# Altium PCB Hamilton.PcbDoc
Units mil, origin at the board's own origin, x right, y up, seen from the top; angles counter-clockwise.
Board outline 1850 x 940 mil, 2 copper layers (Top Layer, Bottom Layer), stack 60.8 mil thick; 14 components, 13 nets, 58 pads, 19 vias.
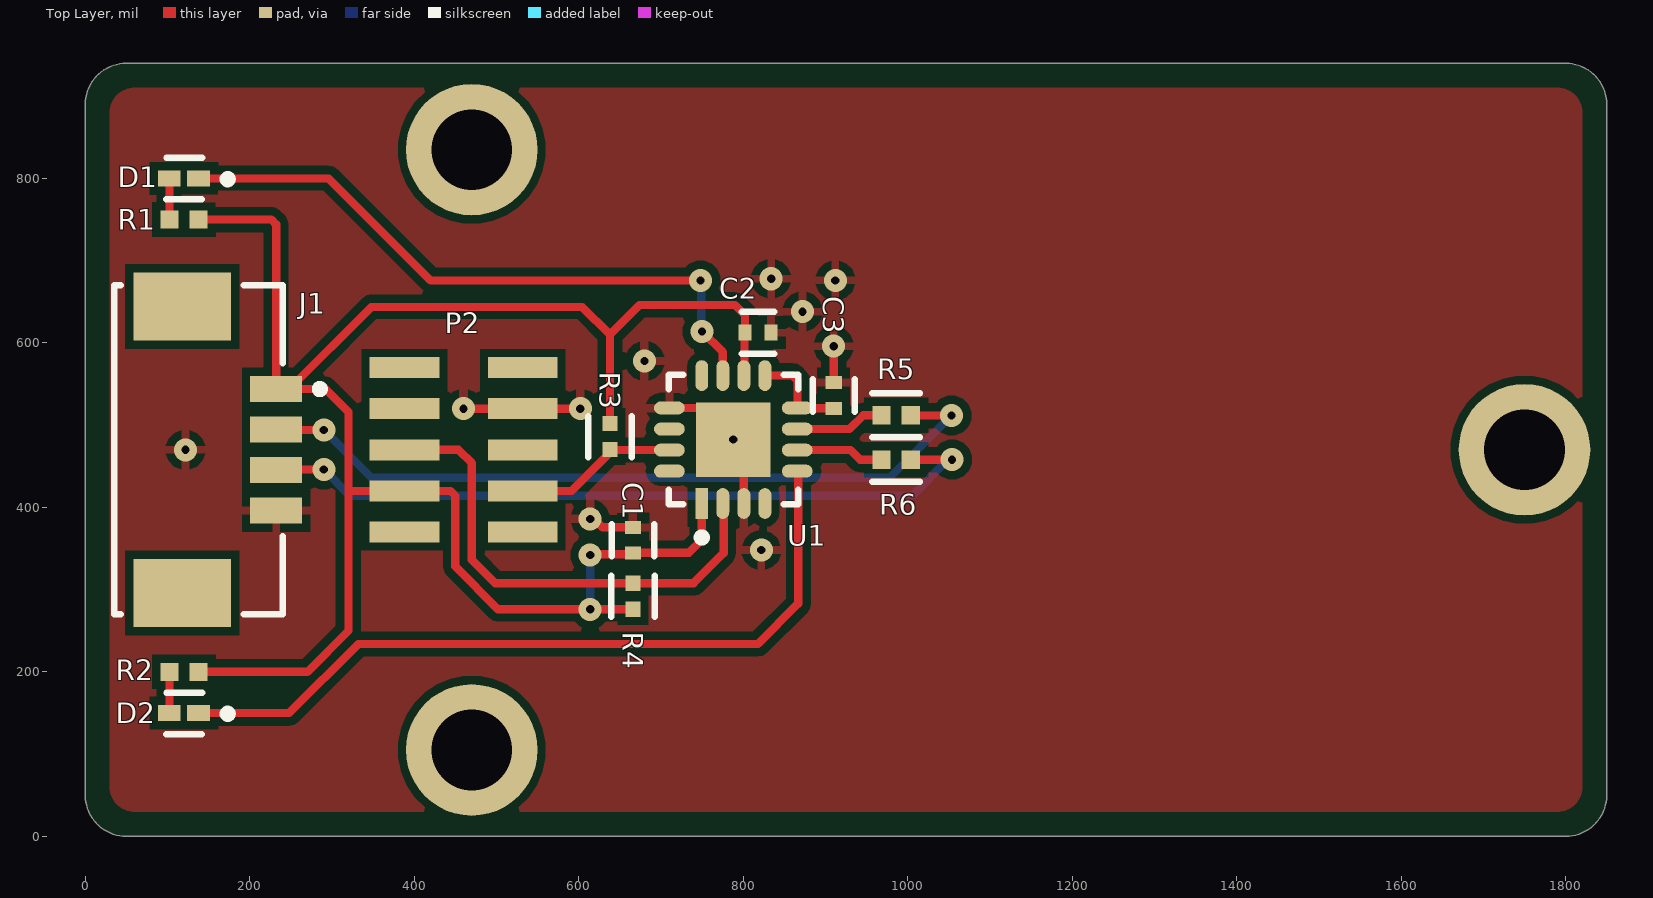
[diagram p0: Top Layer view]
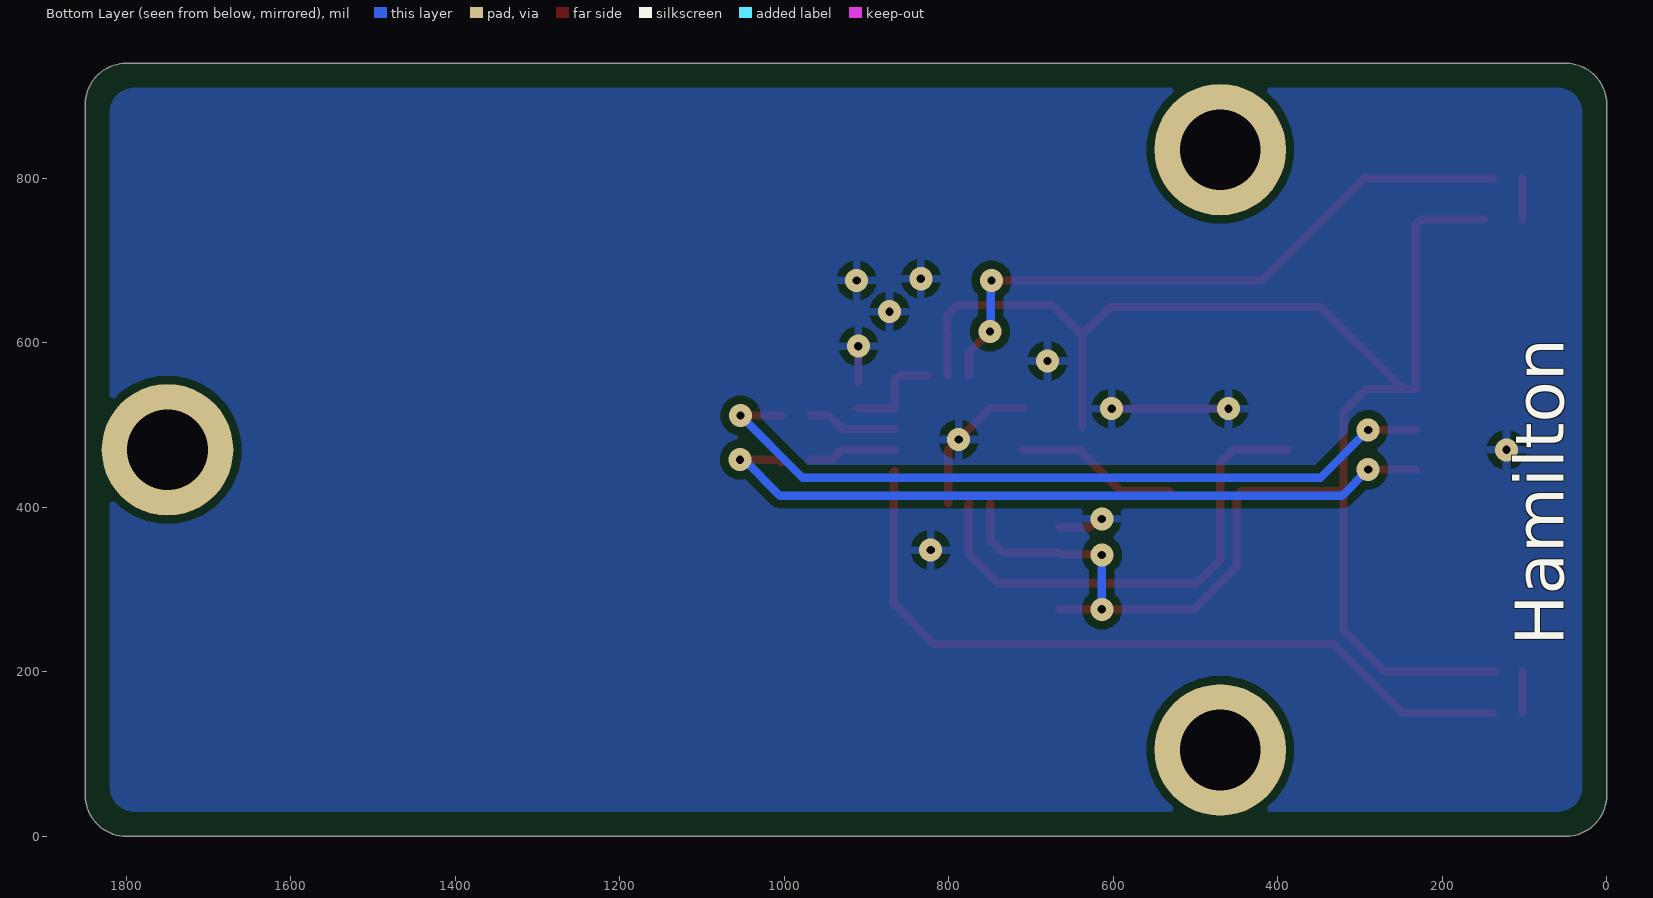
[diagram p1: Bottom Layer view, seen from below]
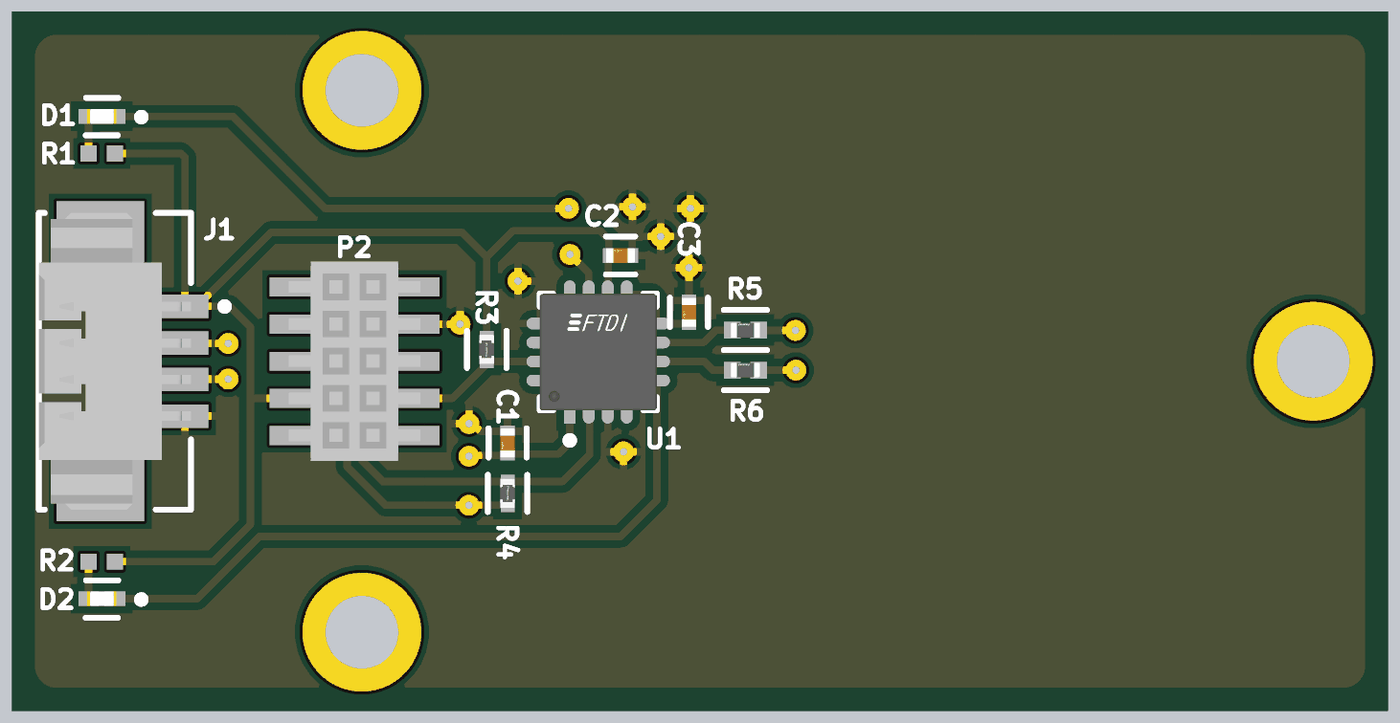
[diagram p2: 3D render of the assembled board from above, using the file's embedded part models]

## Layer stack, top to bottom
Top Solder: solder mask 0.4, Solder Resist, Dk 3.5
Top Layer: signal copper 1.4
Dielectric 1: dielectric 58, FR-4, Dk 4.8
Bottom Layer: signal copper 1.4
Bottom Solder: solder mask 0.4, Solder Resist, Dk 3.5

## Board outline
0,50 0,890 cw(c50,890) 50,940 1800,940 cw(c1800,890) 1850,890 1850,50 cw(c1800,50) 1800,0 50,0 cw(c50,50)

## Design rules (kind name [scope] priority, off if disabled: settings)
Clearance [All] p1: gap=10 ignorepadtopadclearanceinfootprint=FALSE except(0: Arc-Hole Track-Hole SMDPad-Hole THPad-Hole Via-Hole Fill-Hole Poly-Hole Region-Hole Text-Hole)
PolygonConnect [All] p1: connectstyle=Relief reliefconductorwidth=10 reliefentries=4 polygonreliefangle="90 Angle" airgapwidth=10
RoomDefinition Hamilton [InComponentClass('Hamilton')] p1: confinementstyle=ConfineIn formatcopy=TRUE lockcomponents=FALSE outline 0,0 1850,0 1850,940 0,940
RoutingVias [All] p1: holewidth=28 width=50 viastyle="Through Hole" minholewidth=28 minwidth=50 maxholewidth=28 maxwidth=50
SolderMaskExpansion [All] p1: expansion=4 istentingtop=FALSE
Width [All] p1: maxlimit=10 minlimit=10 preferedwidth=10
30 further rules are at their usual default settings.

## Components (designator, comment, footprint, x,y, rotation, side; value= is the part's Value field where it differs from the comment)
C1 "GRM155R70J105KA12D" FP-GRM155-0_05-MFG 666,360 r270 top
C2 "GRM155R70J105KA12D" FP-GRM155-0_05-MFG 818,612.47 r180 top
C3 "GRM155R70J105KA12D" FP-GRM155-0_05-MFG 910,536 r270 top
D1 "APHHS1005CGCK" FP-APHHS1005CGCK-MFG 120,800 r180 top
D2 "APHHS1005CGCK" FP-APHHS1005CGCK-MFG 120,150 r180 top
J1 "53261-0471" MOLEX-53261-0471_V 175,470 r270 top
P2 "20021321-00010C1LF" PCBComponent_1 460,470 r270 top
R1 "ERJ-2GEJ102X" RESC1005X40X25NL05T05 120,750 r0 top
R2 "ERJ-2GEJ102X" RESC1005X40X25NL05T05 120,200 r0 top
R3 "ERJ-2RKF1003X" FP-ERJ2RK-IPC_C 638,486 r90 top
R4 "ERJ-2RKF1003X" FP-ERJ2RK-IPC_C 666,292 r270 top
R5 "ERJ-2RKF27R0X" FP-ERJ2R-IPC_B 986,512 r180 top
R6 "ERJ-2RKF27R0X" FP-ERJ2R-IPC_B 986,458 r180 top
U1 "FT230XQ-R" FP-QFN-16-MFG 788,482.47 r90 top

## Footprints (in the part's own frame and the unit in brackets; to place one, negate y for a bottom-side part, rotate by r counter-clockwise, add the part's x,y. Pads: shape width x height; smd on the part's side, far side on the other; paste and mask are expansions set on the pad)
FP-APHHS1005CGCK-MFG [mm]
  rect 0.7x0.5 smd paste+0 mask+0: 1(-0.45,0) 2(0.45,0)
  silkscreen extent -1.48,-0.63 0.55,0.65, body extent -0.9,-0.4 0.9,0.4, height 0.25
FP-ERJ2R-IPC_B [mil]
  rect 22.37x22.54 smd paste+0 mask+0: 1(-17.8,0) 2(17.8,0)
  silkscreen extent -29,-27 29,27, body extent -35,-17 35,17, height 10
FP-ERJ2RK-IPC_C [mil]
  rect 18.43x18.6 smd paste+0 mask+0: 1(-15.83,0) 2(15.83,0)
  silkscreen extent -25,-27 25,27, body extent -29,-15 29,15, height 10
FP-GRM155-0_05-MFG [mm]
  rect 0.4x0.5 smd paste+0 mask+0: 1(-0.4,0) 2(0.4,0)
  silkscreen extent -0.5,-0.65 0.5,0.65, body extent -0.7,-0.38 0.7,0.38, height 0.25
FP-QFN-16-MFG [mm]
  rect 0.95x0.4 smd paste+0 mask+0: 1(-1.975,0.975)
  rrect100% 0.95x0.4 smd paste+0 mask+0: 2(-1.975,0.325) 3(-1.975,-0.325) 4(-1.975,-0.975) 9(1.975,-0.975) 10(1.975,-0.325) 11(1.975,0.325) 12(1.975,0.975)
  rrect100% 0.4x0.95 smd paste+0 mask+0: 5(-0.975,-1.975) 6(-0.325,-1.975) 7(0.325,-1.975) 8(0.975,-1.975) 13(0.975,1.975) 14(0.325,1.975) 15(-0.325,1.975) 16(-0.975,1.975)
  rect 2.3x2.3 smd paste+0 mask+0: 17(0,0)
  silkscreen extent -3.15,-2 2,2, body extent -2,-2 2,2, height 0.8
MOLEX-53261-0471_V [mm] "SMD, 4-Leads, Body 10.15x5.2mm, Pitch 1.25mm"
  rect 0.8x1.6 smd: 1(-1.875,1.45) 2(-0.625,1.45) 3(0.625,1.45) 4(1.875,1.45)
  rect 2.1x3 smd: MP1(-4.425,-1.45) MP2(4.425,-1.45)
  silkscreen extent -5.08,-3.55 5.08,2.93, body extent -5.08,-3.55 5.07,1.65, height 3.4
PCBComponent_1 [mm]
  rect 0.65x2.15 smd: 1(2.54,-1.825) 2(2.54,1.825) 3(1.27,-1.825) 4(1.27,1.825) 5(0,-1.825) 6(0,1.825) 7(-1.27,-1.825) 8(-1.27,1.825) 9(-2.54,-1.825) 10(-2.54,1.825)
  body extent -3.4,-2.25 3.4,2.25, height 4.5
RESC1005X40X25NL05T05 [mm] "Chip Resistor, 2-Leads, Body 1.00x0.50mm, IPC Medium Density"
  rect 0.55x0.55 smd: 1(-0.45,0) 2(0.45,0)
  body extent -0.53,-0.27 0.53,0.28, height 0.4

## Part data
C1 C2 C3: library part CMP-2008-04587-2, "Chip Multilayer Ceramic Capacitors for General Purpose, 0402, 1.0uF, X7R, 15%, 10%, 6.3V", Capacitance=1uF, Case Code (Imperial)=0402, Case Code (Metric)=1005, Dielectric=X7R, Max Operating Temperature=125°C, Min Operating Temperature=-55°C, Package Quantity=10000, Tolerance=10%, Voltage Rating=6.3V, Case/Package=0402, Depth=0.5mm, Height=0.5mm, Lead Free="Lead Free", Length=1mm, Material=Ceramic, Mount="Surface Mount", Packaging="Tape and Reel", Termination=SMD/SMT, Thickness=0.022inch, Voltage Rating (DC)=6.3V, Weight=0.000212oz, Width=0.5mm
D1 D2: library part CMP-44529-000044-1, "LED GREEN CLEAR CHIP SMD", Case Code (Imperial)=0402, Case Code (Metric)=1005, Color=Green, Forward Current=20mA, Forward Voltage=2.1V, Lens Color=Clear, Max Operating Temperature=85°C, Min Operating Temperature=-40°C, Package Quantity=2000, Case/Package=0402, Dominant Wavelength=570nm, Height=0.6mm, Illumination Color=Green, Lead Free="Lead Free", Length=1mm, Lens Style=Clear, Luminous Intensity=50mcd, Mount="Surface Mount", Number of LEDs=1, Number of Pins=2, Packaging="Tape and Reel", Test Current=20mA, Viewing Angle=120°, Wavelength=570nm, Width=0.5mm
J1: library part CMP-2000-05238-1, "Male Header, Pitch 1.25 mm, 1 x 4 Position, Height 3.4 mm, -40 to 85 degC, RoHS, Tape and Reel", Current Rating=1A, Manufacturer=Molex, Package Description="1.25mm Pitch PicoBlade(TM) Header, Surface Mount, Right Angle, Lead-Free, 4 Circuits", Voltage Rating=125V, Brand=Molex, Contact Material=PhosphorBronze, Contact Plating=Tin, Datasheet URL=http://www.molex.com/pdm_docs/sd/532610471_sd.pdf, Datasheet Version="Rev. G, 01/2012", Factory Pack Quantity=1000, Housing Material=Thermoplastic, Manufacturer URL=http://www.molex.com/, Mounting Angle=Right, Mounting Style=SMD/SMT, Number of Positions=4, Number of Positions / Contacts=4, Number of Rows=1, Packaging=Reel, Pitch=1.25mm, Product Category=Headers&WireHousings, Product Type=Headers, RoHS=Details, Series=53261, Termination Style=SMD, Tradename=PicoBlade, Type=Shrouded
P2: library part "Header 5X2", "Header, 5-Pin, Dual row", LatestRevisionDate=17-Jul-2002, LatestRevisionNote="Re-released for DXP Platform.", Publisher="Altium Limited"
R1 R2: library part CMP-2002-00432-1, Manufacturer=Panasonic, Part Number=ERJ-2GEJ102X
R3 R4: library part CMP-2002-00608-4, "RES SMD 100K OHM 1% 1/10W 0402", Case Code (Imperial)=0402, Case Code (Metric)=1005, Max Operating Temperature=155°C, Max Power Dissipation=100mW, Min Operating Temperature=-55°C, Package Quantity=1, Resistance=100kR, Temperature Coefficient=100ppm/°C, Tolerance=1%, Voltage Rating=50V, Case/Package=0402, Composition="Thick Film", Contact Plating=Tin, Depth=0.5mm, Features="Automotive AEC-Q200", Height=0.35mm, Lead Free="Lead Free", Length=1mm, Military Standard=Not, Mount="Surface Mount", Number of Pins=2, Number of Terminations=2, Packaging="Tape and Reel", Power Rating=100mW, Radiation Hardening=No, REACH SVHC="No SVHC", Termination=SMD/SMT, Voltage Rating (DC)=50V, Width=0.5mm
R5 R6: library part CMP-2002-00830-2, "RES SMD 27 OHM 1% 1/10W 0402", Case Code (Imperial)=0402, Case Code (Metric)=1005, Max Operating Temperature=155°C, Max Power Dissipation=100mW, Min Operating Temperature=-55°C, Package Quantity=1, Resistance=27R, Resistance Tolerance=1%, Resistor Type="Thick Film", Temperature Coefficient=100ppm/°C, Voltage Rating=50V, Case/Package=0402, Construction=Rectangular, Contact Plating=Tin, Depth=0.5mm, Features="Automotive AEC-Q200", Height=0.35mm, Lead Free="Lead Free", Length=1mm, Military Standard=Not, Mount="Surface Mount", Number of Pins=2, Number of Terminations=2, Packaging="Tape and Reel", Power Rating=100mW, Radiation Hardening=No, REACH SVHC="No SVHC", RoHS Compliant=Yes, Series=ERJ, Technology="THICK FILM", Termination=SMD/SMT, Tolerance=1%, Voltage Rating (DC)=50V, Weight=2.8E-05oz, Width=0.5mm
U1: library part CMP-0248-00010-3, "IC USB SERIAL BASIC UART 16QFN", Case/Package=QFN, Max Operating Temperature=85°C, Max Supply Voltage=5.5V, Min Operating Temperature=-40°C, Min Supply Voltage=2.97V, Operating Supply Current=8mA, Operating Supply Voltage=5V, Package Quantity=5000, Data Rate=12Mbps, Height=0.75mm, Interface=USB, Lead Free="Lead Free", Length=4mm, Mount="Surface Mount", Number of Channels=1, Number of Pins=16, Packaging="Tape and Reel", Weight=0.002014oz, Width=4mm

## Free pads (board coordinates)
  round 160 hole 98: 2(470,835) 5(470,105) 6(1750,470)

## Via types
v1: diameter 28, hole 10, Top Layer to Bottom Layer, 19 vias

## Nets (pads, with @x,y where several pads share a name; then routed paths per layer and width w, separated by ;. In a path a pad name is that pad's centre, name@x,y a point inside that pad or via, vN(x,y) a via of type N, cw(c..) or ccw(c..) an arc to the next point about the centre after c; other vN are vias at no path point)
+5: C1.2 C2.2 J1.1 P2.3 R1.2 R2.2 R3.2 R4.2 U1.1 U1.10 | length 2381.5
  Top Layer w10: R2.2@135.24,200 270,200 320,250 320,420 ; 149.56,750 226.23,750 232.09,744.14 J1.1 247.83,543.82 J1.1@248.02,544 ; v1(614,342) 615.13,343.13 664.87,343.13 666.69,344.94 734.07,344.94 749.61,360.48 U1.1 ; R3.2@638,498.31 638,610 ; R4.2@666.17,276 666.08,276.08 614.08,276.08 v1(614,276) 502,276 450,328 450,414.14 444.14,420 P2.3 320,420 ; U1.10 801.52,560.96 801.52,611.74 C2.2 802.25,633.75 790,646 674,646 638,610 ; J1.1@248.02,544 292,544 320,516 320,420 ; J1.1@248.02,544 347.76,643.75 604.25,643.75 638,610
  Bottom Layer w10: v1(614,276) v1(614,342)
GND: C1.1 C2.1 C3.1 J1.4 P2.8 U1.3 U1.13 U1.17 | length 419.2
  Top Layer w10: v1(460,520) P2.8 v1(602,520) ; v1(614,386) 618.87,386 629.12,375.75 C1.1 ; U1.13 749.61,520.86 v1(788,482.47) 800.8,469.68 U1.3 ; C3.1 v1(910,596)
  other v1: 822,348 122,470 680,578 872,638 912,676 834,678
NetC3_2: C3.2 U1.8 U1.9 | length 120.1
  Top Layer w10: U1.9 860.14,560.23 866,554.37 866,521.1 U1.8 866.06,520.56 909.7,520.56 C3.2
NetD1_1: D1.1 U1.11 | length 788.7
  Top Layer w10: D1.1 296,800 420,676 v1(748,676) ; v1(750.02,613.93) 775.2,588.74 U1.11
  Bottom Layer w10: v1(748,676) 749.01,674.99 749.01,614.94 v1(750.02,613.93)
NetD1_2: D1.2 R1.1 | length 50
  Top Layer w10: R1.1 D1.2
NetD2_1: D2.1 U1.5 | length 945.9
  Top Layer w10: D2.1 248,150 332,234 818,234 866.86,282.86 866.86,442.99 U1.5
NetD2_2: D2.2 R2.1 | length 50
  Top Layer w10: D2.2 R2.1
NetJ1_2: J1.2 R5.1 | length 926.7
  Top Layer w10: J1.2 232.69,494 v1(290,494) ; R5.1@1003.36,511.56 v1(1053.28,511.56)
  Bottom Layer w10: v1(290,494) 348,436 977.72,436 v1(1053.28,511.56)
NetJ1_3: J1.3 R6.1 | length 905.5
  Top Layer w10: J1.3 232.69,446 v1(290,446) ; R6.1@1003.6,454.47 1007.13,458 v1(1054,458)
  Bottom Layer w10: v1(290,446) 322,414 1005.13,414 1049.13,458 v1(1054,458)
NetP2_4: P2.4 R3.1 U1.15 | length 197.2
  Top Layer w10: P2.4 591.28,420 637.92,466.64 R3.1@638,466.64 ; R3.1@638.49,469.68 U1.15
NetP2_5: P2.5 R4.1 U1.2 | length 600.1
  Top Layer w10: P2.5 453.72,470 470,453.72 470,336.28 498.45,307.83 R4.1 739.83,307.83 776.3,344.3 776.3,403.62 U1.2
NetR5_2: R5.2 U1.7 | length 109.4
  Top Layer w10: U1.7 929.27,495.27 946,512 R5.2
NetR6_2: R6.2 U1.6 | length 107.3
  Top Layer w10: U1.6 930.32,469.68 942,458 R6.2
pads on no net: J1.MP1 J1.MP2 P2.1 P2.2 P2.6 P2.7 P2.9 P2.10 U1.4 U1.12 U1.14 U1.16

## Polygon pours and split planes (outlines as drawn)
GND on Bottom Layer "GND_L02_P003" (solid, pour order 3): 30,880 cw(c60,880) 60,910 1790,910 cw(c1790,880) 1820,880 1820,60 cw(c1790,60) 1790,30 60,30 cw(c60,60) 30,60
GND on Top Layer "GND_L01_P004" (solid, pour order 4): 30,880 cw(c60,880) 60,910 1790,910 cw(c1790,880) 1820,880 1820,60 cw(c1790,60) 1790,30 60,30 cw(c60,60) 30,60

## Silkscreen, mask and mechanical layers (free items; w line width, h text height)
Bottom Overlay:
  text "Hamilton" at 52,232 h60 r270
Mechanical 1:
  the board outline again, w10